# EAGLE board ADXL335-v11 (EAGLE 6.2)
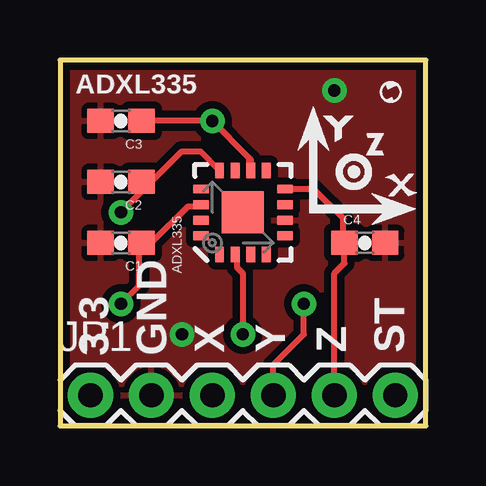
[diagram p0: board, top side]
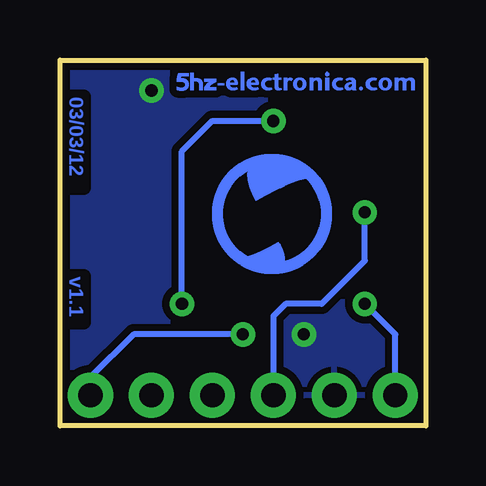
[diagram p1: board, bottom side, seen from below]

Size 15.24 x 15.24 mm. Coordinates in mm from the lower left corner, seen from the top.
Outline: 0,0 15.24,0 15.24,15.24 0,15.24 0,0
Copper layers (1*16): Top 0.035mm / dielectric 1.5mm / Bottom 0.035mm
Design rules: minimum track width 8mil, minimum drill 20mil, track to track 8mil, track to pad 8mil, pad to pad 8mil, via to via 8mil, smd to smd 8mil, copper to edge 10mil, drill to drill 8mil, minimum pad ring 12mil, minimum via ring 10mil, stop-mask expansion 4mil, vias tented up to drill 25mil, thermal gap 10mil

## Footprints (pad centres in the part's own frame; a part is rotated, then mirrored left to right if it is on the bottom)
LFCSP-16 = smd 1.75 x 1.75: 0 0,0 | smd 0.65 x 0.37: 1 -1.75,0.975; 2 -1.75,0.325; 3 -1.75,-0.325; 4 -1.75,-0.975; 9 1.75,-0.975; 10 1.75,-0.325; 11 1.75,0.325; 12 1.75,0.975 | smd 0.37 x 0.65: 5 -0.975,-1.75; 6 -0.325,-1.75; 7 0.325,-1.75; 8 0.975,-1.75; 13 0.975,1.75; 14 0.325,1.75; 15 -0.325,1.75; 16 -0.975,1.75
0603-CAP = smd 1.1 x 1: 1 -0.85,0; 2 0.85,0
1X06 = drill 1.016 pad 1.88: 1 0,0; 2 2.54,0; 3 5.08,0; 4 7.62,0; 5 10.16,0; 6 12.7,0

## Placement (x,y rotation side)
ADXL335  43004  [LFCSP-16]  7.62,8.89 90 top
C1  0.1uF  [0603-CAP]  2.54,7.62 180 top
C2  0.1uF  [0603-CAP]  2.54,10.16 180 top
C3  0.1uF  [0603-CAP]  2.54,12.7 180 top
C4  0.1uF  [0603-CAP]  12.7,7.62 0 top
JP1  [1X06]  1.27,1.27 0 top
LOGO1  LOGO_5HZ_CIRC_COOPER_5MM  [5HZ_LOGO_CIRC_COOPER_5MM]  8.89,6.35 0 bottom
LOGO2  LOGO_5HZ_CIRC_2MM  [5HZ_LOGO_CIRC_2MM]  13.34,13.46 0 top
LOGO3  LOGO_5HZ_WEB_COOPER_10MM  [5HZ_WEB_COOPER_10MM]  10.41,13.97 0 bottom
U$1  EJES_CARTESIANO_5MM  [EJE_CARTESIANO_5MM]  9.91,8.38 0 top

## Library data of the parts
ADXL335 C1-C4 JP1 = SparkFun
LOGO1-LOGO3 = 5hz-electronica
U$1 = PEDRO

## Nets
3.3V: ADXL335.14 C1.1 JP1.1
GND: ADXL335.6 C1.2 C2.2 C3.2 C4.2 JP1.2
ST: ADXL335.2 JP1.6
XOUT: ADXL335.12 C2.1 JP1.3
YOUT: ADXL335.10 C3.1 JP1.4
ZOUT: ADXL335.8 C4.1 JP1.5

## Tracks (layer width: path | path; a pad name or v marks a point on that pad's centre or on a via)
3.3V  (via drill 0.51)
  Top 0.254: ADXL335.14 5.8,9.14 5.33,9.14 3.81,7.62 C1.1 3.3,7.53 3.3,5.84 v2.54,5.08
  Bottom 0.254: v2.54,5.08 1.27,3.81 JP1.1
GND  (via drill 0.51)
  other vias: 11.43,13.97 5.08,3.81
  pour Top (isolate 0.305): 0,0 0,15.24 15.24,15.24 15.24,0
  pour Bottom (isolate 0.305): 0,0 15.24,0 15.24,15.24 0,15.24
ST  (via drill 0.51)
  Top 0.254: v7.62,3.81 7.62,6.35 7.37,6.6 7.37,7.07 ADXL335.2
  Bottom 0.254: v7.62,3.81 12.17,3.81 13.97,2.01 JP1.6
XOUT  (via drill 0.51)
  Top 0.254: 3.81,10.16 C2.1 | 3.81,10.16 5.08,11.43 5.86,11.43 ADXL335.12 | v2.54,8.89 3.81,10.16
  Bottom 0.254: v2.54,8.89 2.54,6.88 4.34,5.08 5.84,5.08 6.35,4.57 JP1.3
YOUT  (via drill 0.51)
  Top 0.254: C3.1 v6.35,12.7 7.87,11.18 | 7.87,11.18 7.87,10.71 ADXL335.10 7.95,11.11 7.87,11.18 | JP1.4 8.89,2.54 10.16,3.81 v10.16,5.08
  Bottom 0.254: v10.16,5.08 10.16,11.43 8.89,12.7 v6.35,12.7
ZOUT
  Top 0.254: ADXL335.8 10.58,9.87 11.81,8.64 11.81,7.66 C4.1 11.85,6.77 11.43,6.35 JP1.5

## Text on the board
Bottom: 03/03/12 | v1.1
tPlace: ADXL335 | 3.3 | GND | X | Y | Z | ST